# Altium PCB IMX385_EVB_revA.PcbDoc
Units mm, origin at the board's own origin, x right, y up, seen from the top; angles counter-clockwise.
Board outline 174 x 162.5 mm, 2 copper layers (Top Layer, Bottom Layer); 109 components, 47 nets, 384 pads, 0 vias.
Unrouted connection lines stored in the file: 311.
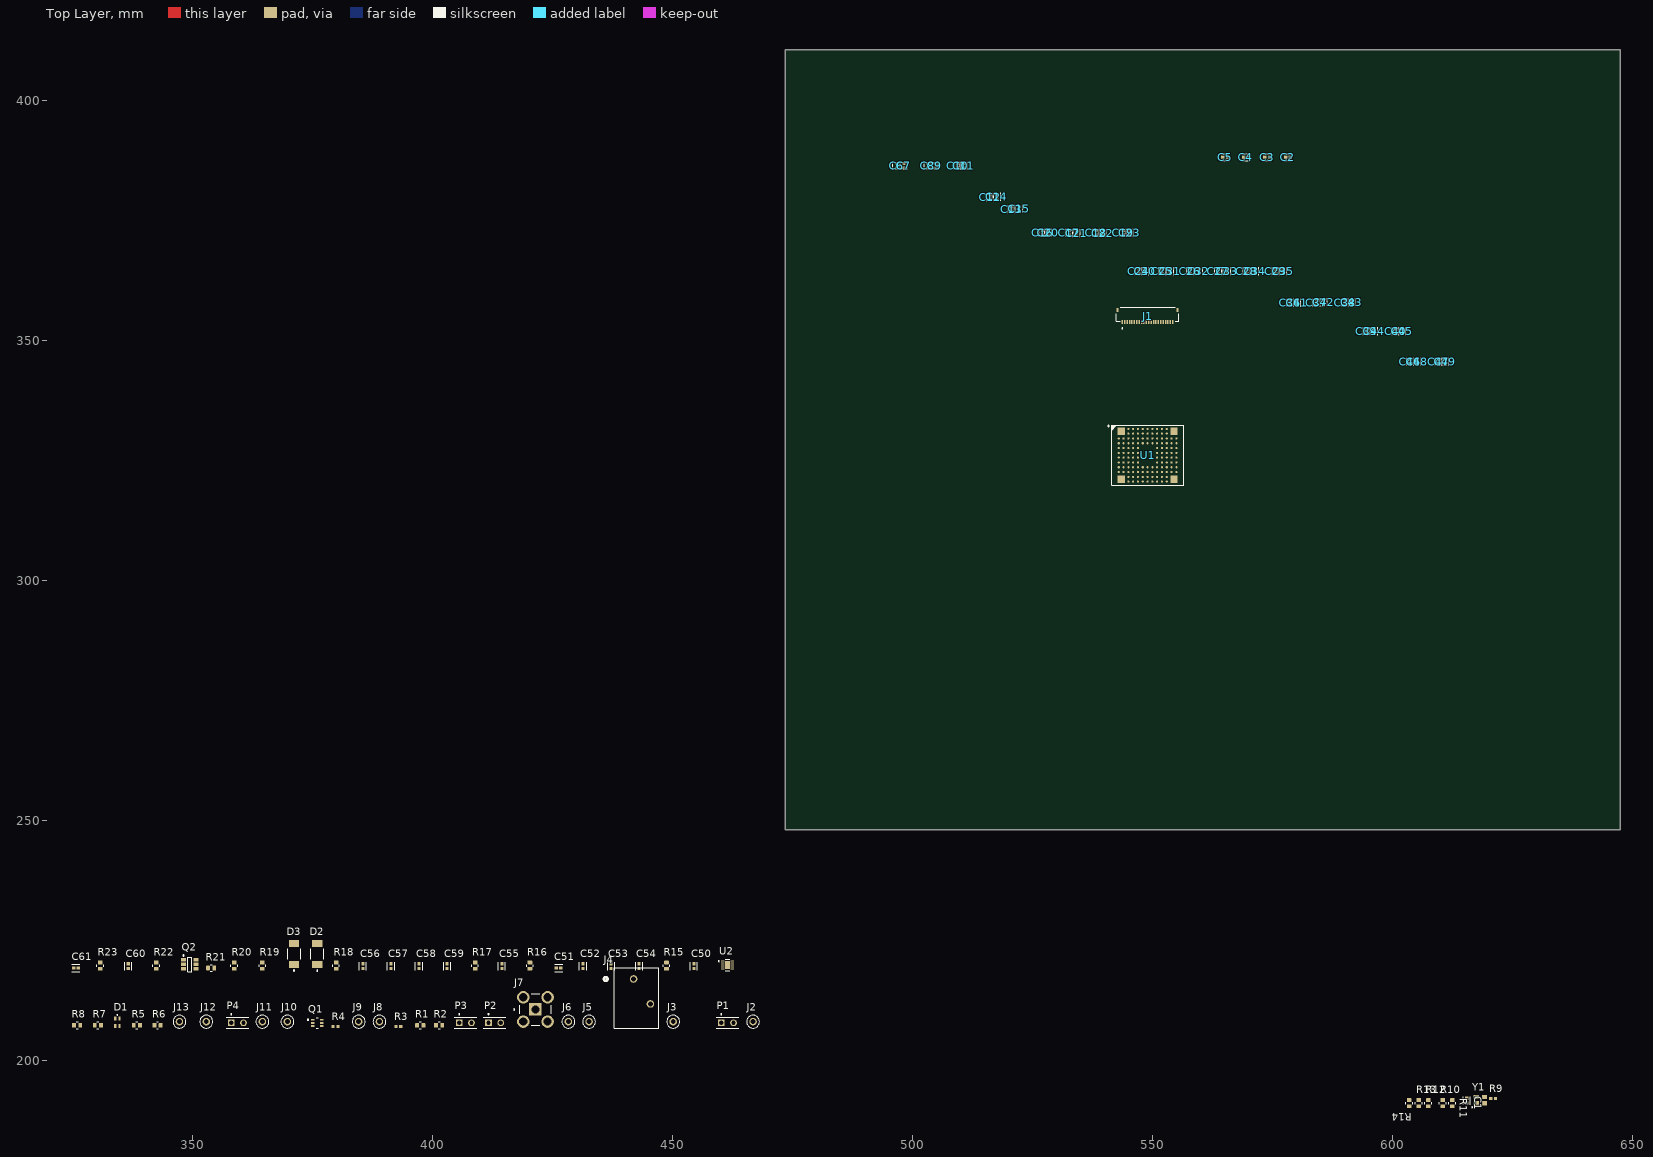
[diagram p0: Top Layer view]
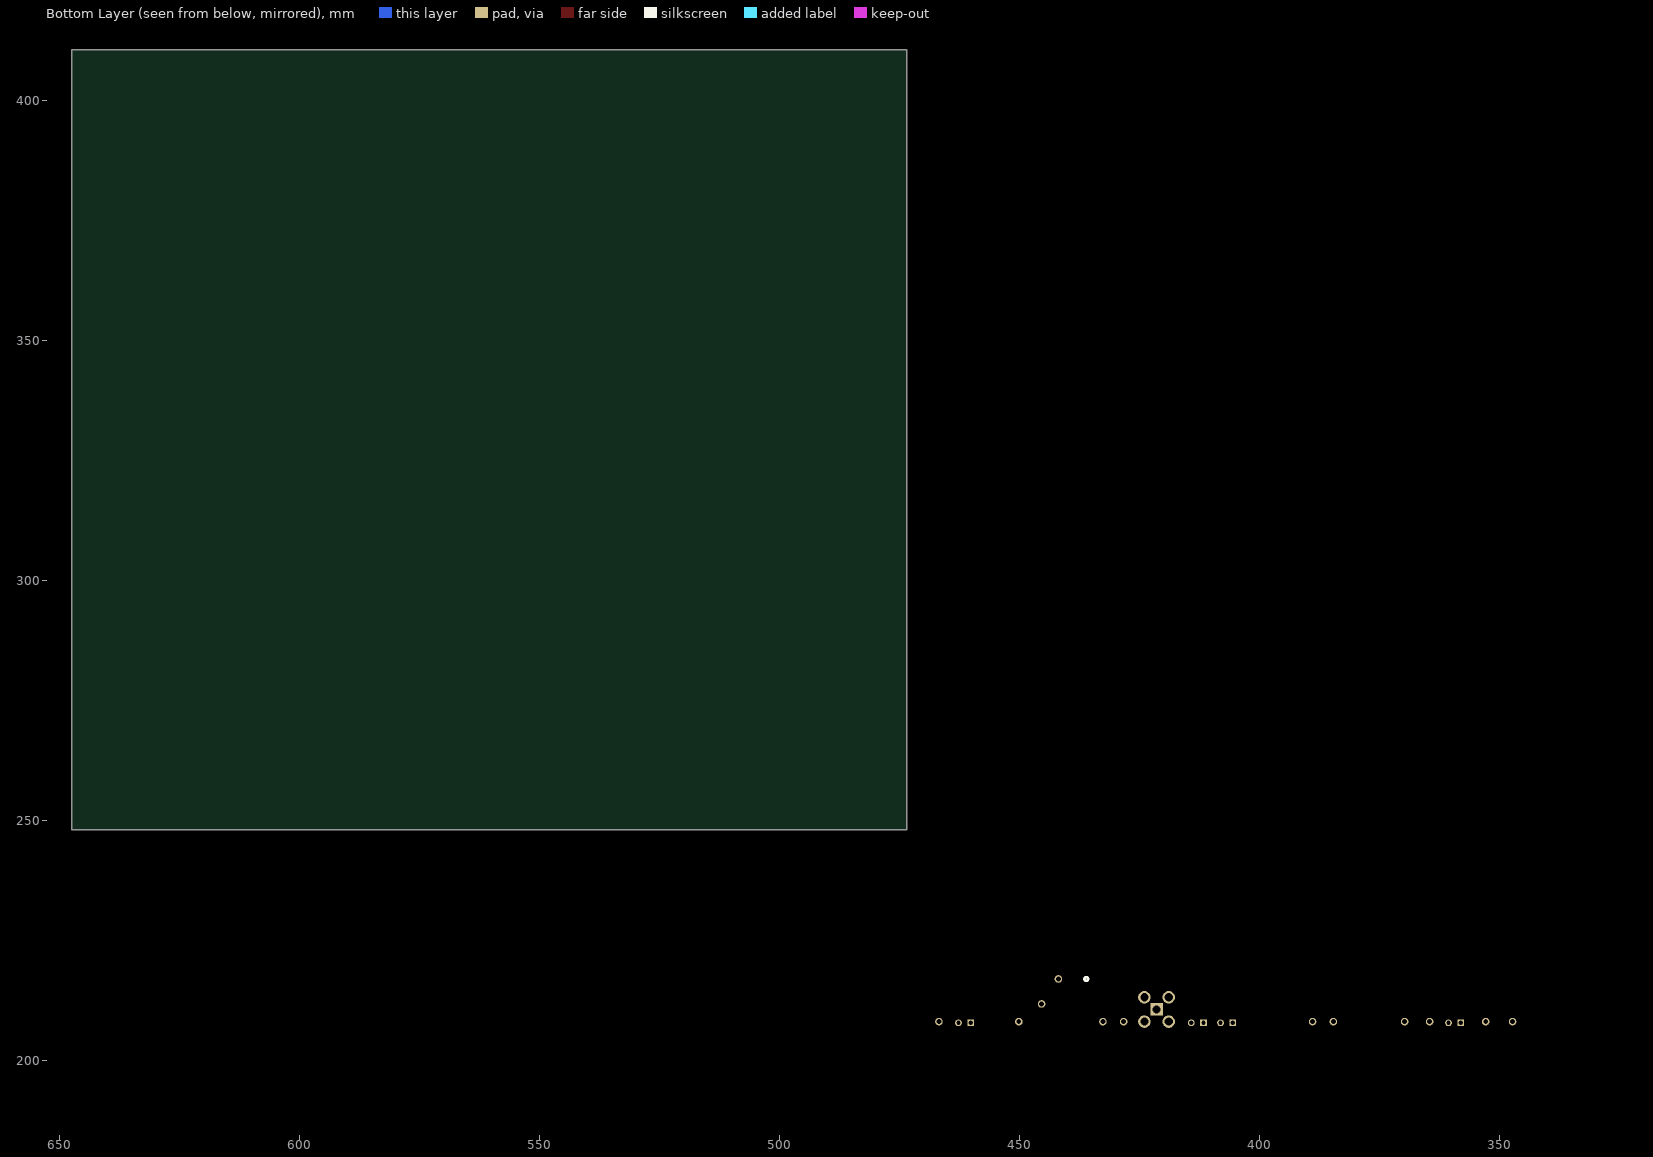
[diagram p1: Bottom Layer view, seen from below]

## Layer stack, top to bottom
Top Solder: solder mask 0.0102, Solder Resist, Dk 3.5
Top Layer: signal copper 0.0356
Dielectric 1: dielectric 0.32, FR-4, Dk 4.8
Bottom Layer: signal copper 0.0356
Bottom Solder: solder mask 0.0102, Solder Resist, Dk 3.5

## Board outline
473.5,248 473.5,410.5 647.5,410.5 647.5,248

## Design rules (kind name [scope] priority, off if disabled: settings)
BoardOutlineClearance [All] p1: gap=0.2 ignorepadtopadclearanceinfootprint=FALSE
Clearance "IMPEDANCE CLEARANCE" [InNetClass('50SINGLE') or InDifferentialPairClass('100DIFF') or InDifferentialPairClass('CSI') vs InNet('GND')] p1: gap=0.102 ignorepadtopadclearanceinfootprint=FALSE except(0.5: Arc-Poly Track-Poly THPad-Poly Via-Poly Fill-Poly Poly-Poly)
Clearance [All] p2: gap=0.102 ignorepadtopadclearanceinfootprint=FALSE except(0.127: Arc-Via Track-Via SMDPad-Via THPad-Via Via-Via Via-Fill Via-Poly Via-Region Via-Text; 0.25: Arc-Hole Track-Hole SMDPad-Hole THPad-Hole Via-Hole Fill-Hole Poly-Hole Region-Hole Text-Hole)
ComponentClearance [All] p1: gap=0.102 collisioncheckmode=3 verticalgap=0.102 showdistances=TRUE
DiffPairsRouting 100OHM [InDifferentialPairClass('100DIFF') or InDifferentialPairClass('CSI')] p1: maxlimit=0.2 minlimit=0.2 mostfreqgap=0.2 toplayer_minwidth=0.217 toplayer_maxwidth=0.217 toplayer_prefwidth=0.217 bottomlayer_minwidth=0.217 bottomlayer_maxwidth=0.217 bottomlayer_prefwidth=0.217 maxuncoupledlength=12.7
DiffPairsRouting [All] p2: maxlimit=0.102 minlimit=0.102 mostfreqgap=0.102 toplayer_minwidth=0.102 toplayer_maxwidth=1816.048 toplayer_prefwidth=0.2 bottomlayer_minwidth=0.102 bottomlayer_maxwidth=1816.048 bottomlayer_prefwidth=0.2 maxuncoupledlength=12.7
Height [All] p1: minheight=0 maxheight=1816.048 prefheight=12.7
HoleSize [All] p1: absolutevalues=TRUE maxlimit=6.3 minlimit=0.2 maxpercent=80.000 minpercent=20.000
HoleToHoleClearance [All] p1: gap=0.25 allowstackedmicrovias=FALSE
MatchedLengths CSI_INTRA_PAIR [InDifferentialPairClass('CSI')] p1: tolerance=25.4 checknetsindiffpair=TRUE checkdiffpairvsdiffpair=FALSE checkxsignals=FALSE checkothers=FALSE usedelayunits=TRUE delaytolerance=1.000000
MatchedLengths CSI_INTER_PAIR [InDifferentialPairClass('CSI')] p2: tolerance=25.4 checknetsindiffpair=FALSE checkdiffpairvsdiffpair=TRUE checkxsignals=TRUE checkothers=TRUE usedelayunits=TRUE delaytolerance=5.000000
MinimumAnnularRing [All] p1: minimumring=0.076
MinimumSolderMaskSliver [All] p1: minsoldermaskwidth=0
PlaneClearance [All] p1: clearance=0.102
PlaneConnect PlaneConnectPowerPads [InPadClass('PowerPads')] p1: planeconnectstyle=Direct reliefexpansion=0.508 reliefentries=4 reliefconductorwidth=0.254 reliefairgap=0.254
PlaneConnect [All] p2: pad.planeconnectstyle=Relief pad.reliefexpansion=0.3 pad.reliefentries=4 pad.reliefconductorwidth=0.102 pad.reliefairgap=0.102 via.planeconnectstyle=Direct via.reliefexpansion=0.3 via.reliefentries=4 via.reliefconductorwidth=0.127 via.reliefairgap=0.127
PolygonConnect PolygonConnectPowerPads [All vs InNetClass('PWR')] p1: connectstyle=Direct reliefconductorwidth=0.254 reliefentries=4 polygonreliefangle="90 Angle" airgapwidth=0.254
PolygonConnect [All] p2: thpad.connectstyle=Relief thpad.reliefconductorwidth=0.102 thpad.reliefentries=4 thpad.polygonreliefangle="90 Angle" thpad.airgapwidth=0.102 smdpad.connectstyle=Relief smdpad.reliefconductorwidth=0.102 smdpad.reliefentries=4 smdpad.polygonreliefangle="90 Angle" smdpad.airgapwidth=0.102 via.connectstyle=Direct via.reliefconductorwidth=0.127 via.reliefentries=4 via.polygonreliefangle="90 Angle" via.airgapwidth=0.127
RoutingVias [All] p1: holewidth=0.2 width=0.45 viastyle="Through Hole" minholewidth=0.2 minwidth=0.45 maxholewidth=6.3 maxwidth=6.55
SilkToSilkClearance [All] p1: silktosilkclearance=0
SilkToSolderMaskClearance [IsPad] p1: minsilkscreentomaskgap=0.102 clearancetoexposedcopper=TRUE
SolderMaskExpansion [All] p1: expansion=0.075 istentingtop=FALSE
SupplyNets "Schematic Supply Nets_8" [InNet('FAKRA_0_GND')] p1: voltage=0.000
SupplyNets "Schematic Supply Nets_7" [InNet('PoC_VCC')] p2: voltage=0.000
SupplyNets "Schematic Supply Nets_6" [InNet('1V8')] p3: voltage=0.000
SupplyNets "Schematic Supply Nets_5" [InNet('3V3')] p4: voltage=0.000
SupplyNets "Schematic Supply Nets_4" [InNet('LO_VCC')] p5: voltage=0.000
SupplyNets "Schematic Supply Nets_3" [InNet('FPC_3V3')] p6: voltage=0.000
SupplyNets "Schematic Supply Nets_2" [InNet('1V2')] p7: voltage=0.000
SupplyNets "Schematic Supply Nets_1" [InNet('GND')] p8: voltage=0.000
Width Width_50OHM [InNetClass('50SINGLE')] p1: maxlimit=0.342 minlimit=0.342 preferedwidth=0.342 minimp=50.000000 maximp=50.000000 favimp=50.000000
Width [All] p2: maxlimit=1816.048 minlimit=0.102 preferedwidth=0.2
20 further rules are at their usual default settings.

## Classes and differential pairs
differential pair class CSI: CSI_CK CSI_D0 CSI_D1 CSI_D2 CSI_D3
component class LDO_ARRAY_0: C50 C51 C52 C53 C54 C55 C56 C57 C58 C59 C60 C61 D2 D3 Q2 R15 R16 R17 R18 R19 R20 R21 R22 R23 U2
component class IMX385_EVB_revA: D1 J1 J2 J3 J4 J5 J6 J7 J8 J9 J10 J11 J12 J13 P1 P2 P3 P4 Q1 R1 R2 R3 R4 R5 R6 R7 R8
component class IMAGE_SENSOR_0: C1 C2 C3 C4 C5 C6 C7 C8 C9 C10 C11 C12 C13 C14 C15 C16 C17 C18 C19 C20 C21 C22 C23 C24 C25 C26 C27 C28 C29 C30 C31 C32 C33 C34 C35 C36 C37 C38 C39 C40 C41 C42 C43 C44 C45 C46 C47 C48 C49 R9 R10 R11 R12 R13 R14 U1 Y1
differential pair CSI_D3: +CSI_D3_P -CSI_D3_N
differential pair CSI_D2: +CSI_D2_P -CSI_D2_N
differential pair CSI_D1: +CSI_D1_P -CSI_D1_N
differential pair CSI_D0: +CSI_D0_P -CSI_D0_N
differential pair CSI_CK: +CSI_CK_P -CSI_CK_N

## Components (designator, comment, footprint, x,y, rotation, side; value= is the part's Value field where it differs from the comment)
C1 "100n" FP-0402-L_1_0_0_05-W_0_5-IPC_A 615.5,191.521 r270 top
C2 "1u" FP-0402-L_1_0_0_05-W_0_5-IPC_A 578.254,388.088 r0 top
C3 "1u" FP-0402-L_1_0_0_05-W_0_5-IPC_A 573.936,388.088 r0 top
C4 "220n" FP-0402-L_1_0_0_05-W_0_5-IPC_A 569.491,388.088 r0 top
C5 "1u" FP-0402-L_1_0_0_05-W_0_5-IPC_A 565.173,388.088 r0 top
C6 "10u" FP-0402-L_1_0_0_05-W_0_5-IPC_A 496.699,386.299 r270 top
C7 "100n" FP-0402-L_1_0_0_05-W_0_5-IPC_A 498.199,386.299 r270 top
C8 "10u" FP-0402-L_1_0_0_05-W_0_5-IPC_A 503.199,386.299 r90 top
C9 "100n" FP-0402-L_1_0_0_05-W_0_5-IPC_A 504.699,386.299 r90 top
C10 "10u" FP-0402-L_1_0_0_05-W_0_5-IPC_A 509.479,386.342 r90 top
C11 "100n" FP-0402-L_1_0_0_05-W_0_5-IPC_A 510.699,386.299 r90 top
C12 "1u" FP-0402-L_1_0_0_05-W_0_5-IPC_A 516.199,379.799 r90 top
C13 "10u" FP-0402-L_1_0_0_05-W_0_5-IPC_A 520.699,377.299 r90 top
C14 "100n" FP-0402-L_1_0_0_05-W_0_5-IPC_A 517.627,379.842 r90 top
C15 "100n" FP-0402-L_1_0_0_05-W_0_5-IPC_A 522.215,377.342 r90 top
C16 "4.7u" FP-0402-L_1_0_0_05-W_0_5-IPC_A 527.148,372.342 r90 top
C17 "4.7u" FP-0402-L_1_0_0_05-W_0_5-IPC_A 532.736,372.342 r90 top
C18 "4.7u" FP-0402-L_1_0_0_05-W_0_5-IPC_A 538.324,372.342 r90 top
C19 "4.7u" FP-0402-L_1_0_0_05-W_0_5-IPC_A 543.912,372.342 r90 top
C20 "10n" FP-0402-L_1_0_0_05-W_0_5-IPC_A 528.288,372.342 r90 top
C21 "10n" FP-0402-L_1_0_0_05-W_0_5-IPC_A 534.199,372.299 r90 top
C22 "10n" FP-0402-L_1_0_0_05-W_0_5-IPC_A 539.699,372.299 r90 top
C23 "10n" FP-0402-L_1_0_0_05-W_0_5-IPC_A 545.306,372.342 r90 top
C24 "4.7u" FP-0402-L_1_0_0_05-W_0_5-IPC_A 547.199,364.299 r90 top
C25 "4.7u" FP-0402-L_1_0_0_05-W_0_5-IPC_A 552.078,364.342 r90 top
C26 "4.7u" FP-0402-L_1_0_0_05-W_0_5-IPC_A 557.92,364.342 r90 top
C27 "4.7u" FP-0402-L_1_0_0_05-W_0_5-IPC_A 563.762,364.342 r90 top
C28 "4.7u" FP-0402-L_1_0_0_05-W_0_5-IPC_A 569.699,364.299 r90 top
C29 "4.7u" FP-0402-L_1_0_0_05-W_0_5-IPC_A 575.699,364.299 r90 top
C30 "100n" FP-0402-L_1_0_0_05-W_0_5-IPC_A 548.539,364.342 r90 top
C31 "100n" FP-0402-L_1_0_0_05-W_0_5-IPC_A 553.699,364.299 r90 top
C32 "100n" FP-0402-L_1_0_0_05-W_0_5-IPC_A 559.715,364.342 r90 top
C33 "100n" FP-0402-L_1_0_0_05-W_0_5-IPC_A 565.557,364.342 r90 top
C34 "100n" FP-0402-L_1_0_0_05-W_0_5-IPC_A 571.399,364.342 r90 top
C35 "100n" FP-0402-L_1_0_0_05-W_0_5-IPC_A 577.241,364.342 r90 top
C36 "4.7u" FP-0402-L_1_0_0_05-W_0_5-IPC_A 578.699,357.799 r90 top
C37 "4.7u" FP-0402-L_1_0_0_05-W_0_5-IPC_A 584.199,357.799 r90 top
C38 "4.7u" FP-0402-L_1_0_0_05-W_0_5-IPC_A 590.199,357.799 r90 top
C39 "1u" FP-0402-L_1_0_0_05-W_0_5-IPC_A 594.699,351.799 r90 top
C40 "1u" FP-0402-L_1_0_0_05-W_0_5-IPC_A 600.699,351.821 r90 top
C41 "100n" FP-0402-L_1_0_0_05-W_0_5-IPC_A 580.199,357.799 r90 top
C42 "100n" FP-0402-L_1_0_0_05-W_0_5-IPC_A 585.671,357.842 r90 top
C43 "100n" FP-0402-L_1_0_0_05-W_0_5-IPC_A 591.513,357.842 r90 top
C44 "10n" FP-0402-L_1_0_0_05-W_0_5-IPC_A 596.184,351.842 r90 top
C45 "10n" FP-0402-L_1_0_0_05-W_0_5-IPC_A 602.026,351.842 r90 top
C46 "1u" FP-0402-L_1_0_0_05-W_0_5-IPC_A 603.699,345.436 r90 top
C47 "1u" FP-0402-L_1_0_0_05-W_0_5-IPC_A 609.699,345.436 r90 top
C48 "100n" FP-0402-L_1_0_0_05-W_0_5-IPC_A 605.158,345.479 r90 top
C49 "100n" FP-0402-L_1_0_0_05-W_0_5-IPC_A 611,345.479 r90 top
C50 "10n" FP-0402-L_1_0_0_05-W_0_5-IPC_A 454.491,219.547 r90 top
C51 "100n" FP-0402-L_1_0_0_05-W_0_5-IPC_A 426.297,219.166 r0 top
C52 "100n" FP-0402-L_1_0_0_05-W_0_5-IPC_A 431.377,219.547 r90 top
C53 "100n" FP-0402-L_1_0_0_05-W_0_5-IPC_A 437.219,219.547 r90 top
C54 "100n" FP-0402-L_1_0_0_05-W_0_5-IPC_A 443.061,219.547 r90 top
C55 "10n" FP-0402-L_1_0_0_05-W_0_5-IPC_A 414.486,219.547 r90 top
C56 "100n" FP-0402-L_1_0_0_05-W_0_5-IPC_A 385.53,219.547 r90 top
C57 "100n" FP-0402-L_1_0_0_05-W_0_5-IPC_A 391.372,219.547 r90 top
C58 "100n" FP-0402-L_1_0_0_05-W_0_5-IPC_A 397.214,219.547 r90 top
C59 "100n" FP-0402-L_1_0_0_05-W_0_5-IPC_A 403.056,219.547 r90 top
C60 "100n" FP-0402-L_1_0_0_05-W_0_5-IPC_A 336.635,219.547 r90 top
C61 "100n" FP-0402-L_1_0_0_05-W_0_5-IPC_A 325.713,219.166 r0 top
D1 "150066RG54050" WL-SBCD_0606 334.349,207.863 r0 top
D2 "DNP/DNO/PMEG3050EP,115" FP-SOD128-MFG 376.005,222.087 r90 top
D3 "DNP/DNO/PMEG3050EP,115" FP-SOD128-MFG 371.179,222.087 r90 top
J1 "FH34SRJ-22S-0.5SH(50)" FH34SRJ-22S-0.5SH(50)-Footprint-1 549,355 r180 top
J2 "5001" FP-5001-MFG 466.81,207.99 r0 top
J3 "5001" FP-5001-MFG 450.173,207.99 r0 top
J4 "1-2834011-2" 1-2834011-2-Footprint-1 441.918,216.88 r0 top
J5 "5001" FP-5001-MFG 432.647,207.99 r0 top
J6 "5001" FP-5001-MFG 428.329,207.99 r0 top
J7 "DNP/1053354-1" FP-1053354-1-MFG 421.471,210.53 r0 top
J8 "5001" FP-5001-MFG 388.959,207.99 r0 top
J9 "5001" FP-5001-MFG 384.641,207.99 r0 top
J10 "5001" FP-5001-MFG 369.782,207.99 r0 top
J11 "5001" FP-5001-MFG 364.575,207.99 r0 top
J12 "5001" FP-5001-MFG 352.891,207.99 r0 top
J13 "5001" FP-5001-MFG 347.303,207.99 r0 top
P1 "5-146280-2" TECO-5-146280-2_V 461.476,207.736 r0 top
P2 "5-146280-2" TECO-5-146280-2_V 412.962,207.736 r0 top
P3 "5-146280-2" TECO-5-146280-2_V 406.866,207.736 r0 top
P4 "5-146280-2" TECO-5-146280-2_V 359.368,207.736 r0 top
Q1 "SSM6N7002KFU,LF" FP-SSOP6-P-0_65A-MFG 376.005,207.736 r0 top
Q2 "FDC6327C" FAIR-SOT23-6_V 349.462,219.928 r0 top
R1 "10k" R0603B 397.468,207.228 r0 top
R2 "10k" R0603B 401.405,207.228 r0 top
R3 "DNP" RESC1005X40X25ML05T05 392.896,206.974 r0 top
R4 "0402 JUMPER" RESC1005X40X25ML05T05 379.815,206.974 r0 top
R5 "10k" R0603B 338.413,207.228 r0 top
R6 "10k" R0603B 342.731,207.228 r0 top
R7 "1k" R0603B 330.285,207.228 r0 top
R8 "1k" R0603B 325.967,207.228 r0 top
R9 "0402 JUMPER" RESC1005X40X25ML05T05 621,192 r0 top
R10 "10k" R0603B 610.5,191 r90 top
R11 "DNP" R0603B 612.5,191 r270 top value=10k
R12 "1k" R0603B 607.5,191 r90 top
R13 "1k" R0603B 605.5,191 r90 top
R14 "10k" R0603B 603.5,191 r270 top
R15 "120k" R0603B 448.776,219.674 r90 top
R16 "100k" R0603B 420.328,219.674 r90 top
R17 "229k" R0603B 408.898,219.674 r90 top
R18 "100k" R0603B 379.942,219.674 r90 top
R19 "100k" R0603B 364.575,219.674 r90 top
R20 "1k" R0603B 358.733,219.674 r90 top
R21 "1k" R0603B 353.907,219.166 r0 top
R22 "100k" R0603B 342.477,219.674 r90 top
R23 "1k" R0603B 330.793,219.674 r90 top
U1 "IMX385LQR-C" BGA128C100P13X12_1500X1250X225 549,326 r0 top
U2 "TLV75101PDSQR" TLV75101PDSQR-Footprint-1 461.476,219.801 r0 top
Y1 "SG-8018CG 37.1250M-TJHSA3" "SG-8018CG 37.1250M-TJHSA3-Footprint-1" 618.35,191.65 r0 top

## Footprints (in the part's own frame and the unit in brackets; to place one, negate y for a bottom-side part, rotate by r counter-clockwise, add the part's x,y. Pads: shape width x height; smd on the part's side, far side on the other; paste and mask are expansions set on the pad)
1-2834011-2-Footprint-1 [mil]
  round 62 / inner round 60 / far side round 62 hole 42 paste-99999 mask+0: 1(0,0) 2(137.8,-204.72)
  silkscreen extent -243,-402 206,92, body extent -132,-386 202,86, height 499
BGA128C100P13X12_1500X1250X225 [mm] "BGA, 128-Leads, Body 15.00x12.50mmx2.25mm, Pitch 1.00mm"
  round 0.45 smd: A3(-4,5.5) A4(-3,5.5) A5(-2,5.5) A6(-1,5.5) A7(0,5.5) A8(1,5.5) A9(2,5.5) A10(3,5.5) A11(4,5.5) B3(-4,4.5) B4(-3,4.5) B5(-2,4.5) B6(-1,4.5) B7(0,4.5) B8(1,4.5) B9(2,4.5) B10(3,4.5) B11(4,4.5) C1(-6,3.5) C2(-5,3.5) C3(-4,3.5) C4(-3,3.5) C5(-2,3.5) C6(-1,3.5) C7(0,3.5) C8(1,3.5) C9(2,3.5) C10(3,3.5) C11(4,3.5) C12(5,3.5) C13(6,3.5) D1(-6,2.5) D2(-5,2.5) D3(-4,2.5) D4(-3,2.5) D5(-2,2.5) D6(-1,2.5) D7(0,2.5) D8(1,2.5) D9(2,2.5) D10(3,2.5) D11(4,2.5) D12(5,2.5) D13(6,2.5) E1(-6,1.5) E2(-5,1.5) E3(-4,1.5) E4(-3,1.5) E5(-2,1.5) E9(2,1.5) E10(3,1.5) E11(4,1.5) E12(5,1.5) E13(6,1.5) F1(-6,0.5) F2(-5,0.5) F3(-4,0.5) F4(-3,0.5) F5(-2,0.5) F9(2,0.5) F10(3,0.5) F11(4,0.5) F12(5,0.5) F13(6,0.5) G1(-6,-0.5) G2(-5,-0.5) G3(-4,-0.5) G4(-3,-0.5) G5(-2,-0.5) G9(2,-0.5) G10(3,-0.5) G11(4,-0.5) G12(5,-0.5) G13(6,-0.5) H1(-6,-1.5) H2(-5,-1.5) H3(-4,-1.5) H4(-3,-1.5) H5(-2,-1.5) H9(2,-1.5) H10(3,-1.5) H11(4,-1.5) H12(5,-1.5) H13(6,-1.5) J1(-6,-2.5) J2(-5,-2.5) J3(-4,-2.5) J4(-3,-2.5) J5(-2,-2.5) J6(-1,-2.5) J7(0,-2.5) J8(1,-2.5) J9(2,-2.5) J10(3,-2.5) J11(4,-2.5) J12(5,-2.5) J13(6,-2.5) K1(-6,-3.5) K2(-5,-3.5) K3(-4,-3.5) K4(-3,-3.5) K5(-2,-3.5) K6(-1,-3.5) K7(0,-3.5) K8(1,-3.5) K9(2,-3.5) K10(3,-3.5) K11(4,-3.5) K12(5,-3.5) K13(6,-3.5) L3(-4,-4.5) L4(-3,-4.5) L5(-2,-4.5) L6(-1,-4.5) L7(0,-4.5) L8(1,-4.5) L9(2,-4.5) L10(3,-4.5) L11(4,-4.5) M3(-4,-5.5) M4(-3,-5.5) M5(-2,-5.5) M6(-1,-5.5) M7(0,-5.5) M8(1,-5.5) M9(2,-5.5) M10(3,-5.5) M11(4,-5.5)
  rect 1.5x1.5 smd: EP1(-5.5,5) EP2(5.5,5) EP3(-5.5,-5) EP4(5.5,-5)
  silkscreen extent -8.27,-6.25 7.5,6.25, body extent -7.5,-6.25 7.5,6.25, height 2.25
FAIR-SOT23-6_V [mm] "SOT23, 6-Leads, Body 2.9x1.6mm, Pitch 0.95mm"
  rect 1x0.7 smd: 1(-1.3,0.95) 2(-1.3,0) 3(-1.3,-0.95) 4(1.3,-0.95) 5(1.3,0) 6(1.3,0.95)
  silkscreen extent -1.42,-1.5 0.4,1.97, body extent -1.4,-1.45 1.4,1.45, height 1.45
FH34SRJ-22S-0.5SH(50)-Footprint-1 [mm]
  rect 0.3x0.8 smd paste-1: 1(5.25,1.25) 2(4.75,1.25) 3(4.25,1.25) 4(3.75,1.25) 5(3.25,1.25) 6(2.75,1.25) 7(2.25,1.25) 8(1.75,1.25) 9(1.25,1.25) 10(0.75,1.25) 11(0.25,1.25) 12(-0.25,1.25) 13(-0.75,1.25) 14(-1.25,1.25) 15(-1.75,1.25) 16(-2.25,1.25) 17(-2.75,1.25) 18(-3.25,1.25) 19(-3.75,1.25) 20(-4.25,1.25) 21(-4.75,1.25) 22(-5.25,1.25)
  rect 0.4x0.8 smd: S1(6.25,-1.25) S2(-6.25,-1.25)
  silkscreen extent -6.5,-1.8 6.5,2.65, body extent -6.5,-1.9 6.5,1.9, height 1
FP-0402-L_1_0_0_05-W_0_5-IPC_A [mm]
  rect 0.715x0.672 smd paste+0 mask+0: 1(-0.479,0) 2(0.479,0)
  silkscreen extent -0.84,-0.74 0.84,0.74, body extent -1.04,-0.54 1.04,0.54, height 0.25
FP-5001-MFG [mm]
  round 1.57 hole 1.016 paste-2539.97 mask+0: 1(0,0)
  silkscreen extent -1.35,-1.34 1.35,1.34, body extent -1.45,-1.45 1.45,1.45, height 0.25
FP-1053354-1-MFG [mm]
  rect 2.6x2.6 hole 1.7 paste-2539.97 mask+0: 1(0,0)
  round 2.6 hole 1.7 paste-2539.97 mask+0: 2(-2.54,2.54) 3(2.54,2.54) 4(-2.54,-2.54) 5(2.54,-2.54)
  silkscreen extent -4.56,-3.24 3.24,3.24, body extent -3.94,-3.94 3.94,3.94, height 0.25
FP-SOD128-MFG [mm]
  rect 1.4x2.1 smd paste-1000 mask+0: 1(-2.2,0) 2(2.2,0)
  silkscreen extent -3.57,-1.35 1.12,1.35, body extent -3.1,-1.7 3.1,1.7, height 0.25
FP-SSOP6-P-0_65A-MFG [mm]
  rect 0.8x0.4 smd paste+0 mask+0: 1(-0.95,0.65) 2(-0.95,0) 3(-0.95,-0.65) 4(0.95,-0.65) 5(0.95,0) 6(0.95,0.65)
  silkscreen extent -2.05,-1.1 0.18,1.1, body extent -1.45,-1.2 1.45,1.2, height 0.25
R0603B [mm] "Chip Resistor, 0603, 2-Leads, Body 1.58x0.85mm, IPC Medium Density"
  rrect25% 0.8x0.95 smd: 1(-0.65,0) 2(0.65,0)
  silkscreen extent -0.2,-0.7 0.2,0.7, body extent -0.82,-0.48 0.82,0.48, height 0.5
RESC1005X40X25ML05T05 [mm] "Chip Resistor, 2-Leads, Body 1.00x0.50mm, IPC Low Density"
  rect 0.65x0.65 smd: 1(-0.5,0) 2(0.5,0)
  body extent -0.53,-0.27 0.53,0.28, height 0.4
"SG-8018CG 37.1250M-TJHSA3-Footprint-1" [mm]
  rrect22% 1.1x0.9 smd: 1(-0.85,-0.65) 2(0.85,-0.65) 3(0.85,0.65) 4(-0.85,0.65)
  silkscreen extent -1.85,-1.6 -1.65,-1.4
TECO-5-146280-2_V [mm] "Connector, 2-Leads, Body 4.67x2.34mm, Pitch 2.54mm"
  rect 1.4x1.4 hole 0.89: 1(-1.27,0)
  round 1.4 hole 0.89: 2(1.27,0)
  silkscreen extent -2.33,-1.17 2.33,1.94, body extent -2.34,-1.17 2.34,1.17, height 5.33
TLV75101PDSQR-Footprint-1 [mil]
  rect 27.81x8.03 smd paste+0 mask+0: 1(-39.41,31.5) 2(-39.41,15.75) 3(-39.41,0) 4(-39.41,-15.75) 5(-39.41,-31.5) 6(39.41,-31.5) 7(39.41,-15.75) 8(39.41,0) 9(39.41,15.75) 10(39.41,31.5)
  rect 39x63 smd paste+0 mask+0: 11(0,0)
  silkscreen extent -75,-46 18,46, body extent -41,-41 41,41, height 32
WL-SBCD_0606 [mm] "SMT Bi-color Chip LED Diffuesed, body 1.5x1.6mm"
  rect 0.5x0.8 smd: 1(-0.45,0.8) 2(-0.45,-0.8) 3(0.45,-0.8) 4(0.45,0.8)
  silkscreen extent -0.07,1.48 0.08,1.62, body extent -0.75,-0.8 0.75,0.8, height 0.55

## Part data
C1 C2 C3 C4 C5 C6 C7 C8 C9 C10 C11 C12 C13 C14 C15 C16 C17 C18 C19 C20 C21 C22 C23 C24 C25 C26 C27 C28 C29 C30 C31 C32 C33 C34 C35 C36 C37 C38 C39 C40 C41 C42 C43 C44 C45 C46 C47 C48 C49 C50 C51 C52 C53 C54 C55 C56 C57 C58 C59 C60 C61: library part CMP-001-00058-1, "LARGE PADS, 0402 CAP, CHANGE COMMENT TO MATCH REAL P/N", Capacitor Type=Ceramic, Case/Package=0402, Max Operating Temperature=85°C, Min Operating Temperature=-55°C, Mounting Technology="Surface Mount", Pins=2, RoHS Compliant=Yes
D1: library part CMP-004-00040-2, "Led, Red/Grn, 180Mcd/230Mcd, 624Nm/525Nm Rohs Compliant: Yes", Component Type=Standard, Design Item ID=CMP-004-00034-2, Pins=4, Source=rgled.SchLib
D2 D3: library part CMP-14398-000051-1, "DIODE SCHOTTKY 30V 5A SOD128", RoHS Compliant=Yes
J1: library part CMP-002-00104-1, "0.5Mm Pitch, 1.0Mm Height, Top And Bottom Contact, Back-Flip", Max Operating Temperature=105°C, Min Operating Temperature=-55°C, Connector Type=Receptacle, Mounting Technology="Surface Mount", Pins=22
J2 J3 J5 J6 J8 J9 J10 J11 J12 J13: library part CMP-2000-05181-2, "PC TEST POINT MINIATURE BLACK", Color=Black, Flammability Rating="UL94 V-0", Package Quantity=100, Body Material=Bronze, Contact Material=Bronze, Contact Plating=Silver, Diameter=2.54mm, Height=0.3inch, Hole Diameter=1.6mm, Housing Color=Black, Inside Diameter=1.27mm, Insulation=Insulated, Insulation Material=Nylon, Lead Free="Lead Free", Length=7.62mm, Material=Nylon, Mount="Through Hole", Number of Contacts=1, Number of Ports=1, Orientation=Straight, Outside Diameter=2.54mm, Packaging=Bulk, Plating=Silver, REACH SVHC="No SVHC", RoHS Compliant=Yes, Series=THM, Termination="Through Hole"
J4: library part CMP-002-00067-1, "Barrier Strip Terminal Block", RoHS Compliant=Yes
J7: library part CMP-2000-05830-2, "CONN SMA JACK STR 50 OHM PCB", Case/Package=SMA, Dielectric Material=PTFE, Frequency=18GHz, Housing Color=Gold, Max Frequency=12.4GHz, Operating Frequency=N/A, Package Quantity=125, Body Material="Stainless Steel", Body Plating=Gold, Center Contact Plating=Gold, Connector Type=SMA, Contact Material=Copper, Contact Plating=Gold, Depth=6.3mm, Fastening Type=Threaded, Gender=Female, Height=9.5mm, Impedance=50R, Insulation Material=Polytetrafluoroethylene, Length=9.53mm, Mating Cycles=500, Mount="Through Hole", Number of Ports=1, Orientation=Straight, Packaging=Bag, PCB Mounting Orientation=Vertical, Plating=Gold, Polarity=Normal, Radiation Hardening=No, REACH SVHC="No SVHC", RoHS Compliant=Yes, Series=SMA, Termination=Solder
P1 P2 P3 P4: library part CMP-2000-07492-1, "Male Header, Pitch 2.54 mm, 1 x 2 Position, Height 8.21 mm, Tail Length 3.05 mm, -65 to 105 degC, RoHS, Bulk", Case\/Package=100, Colour=Black, Current Rating=3A, Flammability Rating=UL94V-0, High Temperature Housing=Yes, Manufacturer="TE Connectivity", Max Current Rating=5A, Max Operating Temperature=105degC, Min Operating Temperature=-65degC, Package Description="Male Header, Pitch 2.54 mm, 1 x 2 Position, Height 8.21 mm, Tail Length 3.05 mm", Package Quantity=500, Approvals=CSA, Board Standoff=No(Without), Connector Type=Header, Contact Gender=Male, Contact Material=CopperAlloy, Contact Mating Length=0.23inch, Contact Plating=Matte, Contact Protection=No(Without), Contact Shape=Square, Datasheet URL=http://www.te.com/commerce/DocumentDelivery/DDEController?Action=showdoc&DocId=Customer+Drawing%7F146280%7FH1%7Fpdf%7FEnglish%7FENG_CD_146280_H1.pdf%7F5-146280-2, Datasheet Version="Rev. H1, 08/2016", Depth=2.34mm, Gasket=No(Without), High Speed Serial Data Connector=No, Housing Colour=Black, Housing Material=Polymer, Keyed=No, Length=4.67mm, Manufacturer URL=http://www.te.com/, Mating Alignment=No(Without), Mating Connector Lock=No(Without), Mating Post Length=0.23inch, Mount=ThroughHole, Mounting Technology=ThroughHole, Number of Contacts=2, Number of Positions=2, Number of Rows=1, Orientation=Straight, Package Reference=5-146280-2, Packaging=Carton, Panel Mount Retention=No(Without), PCB Mount Retention=Without, PCB Mounting Orientation=Vertical, PCB Thickness=0.063inch, Pitch=2.54mm, Radiation Hardening=No, RoHSCompliant=true, Row Spacing=2.54mm, Selectively Loaded=No(Without), Stabilizers=No(Without), Termination=ThroughHole, Termination Post Length=0.12inch
Q1: library part CMP-35916-000009-1, "MOSFET 2N-CH 60V 0.3A", Continuous Drain Current (ID)=300mA, Drain to Source Voltage (Vdss)=60V, Input Capacitance=40pF, Max Power Dissipation=285mW, FET Type="2 N-Channel", Mount="Surface Mount", Packaging="Tape and Reel", Rds On Max=1.5R
Q2: library part CMP-2000-04939-1, "Dual N & P-Channel 2.5 V Specified PowerTrench(TM) MOSFET, -55 to 150 degC, 6-Pin SOT-23, RoHS, Tape and Reel", Manufacturer=Fairchild, Maximum Continuous Drain Current=2.7@NChannel, Maximum Drain Source Voltage=20V, Maximum Gate Source Voltage=±8V, Operating Temperature=-55to150degC, Package=6SuperSOT, Package Description="6-Pin Small Outline Transistor, Body 2.9 x 1.6 mm, Pitch 0.95 mm", Package Reference=SOT23-6, Package Version="Rev. 5, 05/2015", Category=MOSFET, Channel Mode=Enhancement, Channel Type=N, Datasheet URL=https://www.fairchildsemi.com/datasheets/FD/FDC6327C.pdf, Datasheet Version="Rev. E, 07/2000", Manufacturer URL=https://www.fairchildsemi.com/, Mounting=SurfaceMount, Package URL=https://www.fairchildsemi.com/package-drawings/MA/MA06A.pdf, Packaging=Tape&Reel, Rad Hard=No, RDS-on=80@4.5V@NChannel, Typical Fall Time=3@NChannel, Typical Rise Time=9@NChannel, Typical Turn-Off Delay Time=12@NChannel, Typical Turn-On Delay Time=5@NChannel
R1 R2 R5 R6 R7 R8 R10 R11 R12 R13 R14 R15 R16 R17 R18 R19 R20 R21 R22 R23: library part CMP-009-00002-14, "Resistor"
R3 R4 R9: library part CMP-009-00118-2, "READ THE NAME", Component Type=Standard, Design Item ID=CMP-009-00206-2, Pins=2, Source=0402jump.SchLib
U1: library part CMP-010-00040-3, "Sony Starvis 2.13MP MIPI 1/2\" Image Sensor"
U2: library part CMP-019-00062-2, "500-mA, low-IQ, high-PSRR, dual-channel low-dropout (LDO) voltage regulator 10-WSON -40 to 125", Pins=10
Y1: library part CMP-003-00017-1, "SG-8018CG 37.1250M-TJHSA3: Mhz Osc 1.8V~3.3V +/-50PPM -40~105C St 250TR", Frequency=37.125MHz, Load Capacitance=15pF, Max Operating Temperature=105°C, Min Operating Temperature=-40°C, Mounting Technology="Surface Mount"

## Nets (pads, with @x,y where several pads share a name; then routed paths per layer and width w, separated by ;. In a path a pad name is that pad's centre, name@x,y a point inside that pad or via, vN(x,y) a via of type N, cw(c..) or ccw(c..) an arc to the next point about the centre after c; other vN are vias at no path point)
1V2_PWR_OUT: C24.1 C25.1 C26.1 C27.1 C28.1 C29.1 C30.1 C31.1 C32.1 C33.1 C34.1 C35.1 C36.1 C37.1 C38.1 C39.1 C40.1 C41.1 C42.1 C43.1 C44.1 C45.1 C46.1 C47.1 C48.1 C49.1 C50.2 C53.1 C54.1 D2.2 J6.1 R21.1 U1.C13 U1.D4 U1.D5 U1.D6 U1.D9 U1.D10 U1.J5 U1.J6 U1.J7 U1.M6 U1.M8 U1.M10 U1.M11 U2.10
1V8_IMX385_INCK: R3.1 R4.1 R9.2 U1.D7
1V8_IMX385_nRST: D1.4 P4.2 R11.2 U1.C6
1V8_IMX385_SCK: J10.1 Q1.4 R6.1 R13.1 U1.E5
1V8_IMX385_SDA: J8.1 Q1.1 R2.1 R12.1 U1.F5
1V8_IMX385_XHS: J13.1 U1.B6
1V8_IMX385_XTRIG: J11.1 U1.G5
1V8_IMX385_XVS: J12.1 U1.A6
1V8_PWR_OUT: C1.1 C16.1 C17.1 C18.1 C19.1 C20.1 C21.1 C22.1 C23.1 C55.2 C58.1 C59.1 D3.2 J5.1 Q1.2 Q1.5 R2.2 R6.2 R8.2 R10.2 R11.1 R12.2 R13.2 R23.1 U1.F9 U1.F10 U1.G9 U1.G10 U2.8 Y1.4
3V3: C6.1 C7.1 C8.1 C9.1 C10.1 C11.1 C12.1 C13.1 C14.1 C15.1 D1.2 J3.1 Q2.5 R1.2 R5.2 U1.D1 U1.G1 U1.H1 U1.J1 U1.K1
3V3_EN_1V8: C60.1 R21.2 U2.5
3V3_EN_3V3: C61.1 Q2.3 R22.1 R23.2
3V3_FPC_IO0: J1.6 P4.1
3V3_FPC_SCL: J1.3 P3.1
3V3_FPC_SDA: J1.2 P2.1
3V3_IMX385_SCK: P3.2 Q1.3 R5.1
3V3_IMX385_SDA: P2.2 Q1.6 R1.1
3V3_PWR_IN: C51.1 C52.1 C56.1 C57.1 D2.1 D3.1 J4.1 P1.2 Q2.6 R19.1 U2.3 U2.6 U2.9
CSI_CK_N: J1.15 U1.B9
CSI_CK_P: J1.14 U1.A9
CSI_D0_N: J1.21 U1.B8
CSI_D0_P: J1.20 U1.A8
CSI_D1_N: J1.18 U1.B10
CSI_D1_P: J1.17 U1.A10
CSI_D2_N: J1.12 U1.B7
CSI_D2_P: J1.11 U1.A7
CSI_D3_N: J1.9 U1.B11
CSI_D3_P: J1.8 U1.A11
FPC_3V3: J1.1 J2.1 P1.1
GND: C1.2 C2.2 C3.2 C4.2 C5.2 C6.2 C7.2 C8.2 C9.2 C10.2 C11.2 C12.2 C13.2 C14.2 C15.2 C16.2 C17.2 C18.2 C19.2 C20.2 C21.2 C22.2 C23.2 C24.2 C25.2 C26.2 C27.2 C28.2 C29.2 C30.2 C31.2 C32.2 C33.2 C34.2 C35.2 C36.2 C37.2 C38.2 C39.2 C40.2 C41.2 C42.2 C43.2 C44.2 C45.2 C46.2 C47.2 C48.2 C49.2 C51.2 C52.2 C53.2 C54.2 C56.2 C57.2 C58.2 C59.2 C60.2 C61.2 J1.4 J1.7 J1.10 J1.13 J1.16 J1.19 J1.22 J1.S1 J1.S2 J4.2 J7.2 J7.3 J7.4 J7.5 Q2.2 R7.1 R14.2 R16.1 R18.1 R22.2 U1.A3 U1.B3 U1.C3 U1.C4 U1.C5 U1.C7 U1.C8 U1.C9 U1.C10 U1.C11 U1.C12 U1.D2 U1.D3 U1.D8 U1.E9 U1.E10 U1.EP1 U1.EP2 U1.EP3 U1.EP4 U1.F2 U1.F3 U1.G2 U1.G4 U1.H2 U1.H4 U1.H5 U1.H9 U1.H10 U1.H13 U1.J2 U1.J4 U1.J8 U1.J9 U1.J10 U1.J11 U1.K2 U1.K3 U1.K4 U1.K5 U1.K6 U1.K7 U1.K8 U1.K9 U1.K10 U1.K11 U1.L3 U1.L4 U1.L5 U1.L6 U1.L7 U1.L8 U1.L9 U1.L10 U1.L11 U1.M3 U1.M4 U1.M5 U1.M7 U1.M9 U2.2 U2.4 U2.11 Y1.1 Y1.2
NetC2_1: C2.1 U1.F1 U1.G3
NetC3_1: C3.1 U1.C1 U1.C2
NetC4_1: C4.1 U1.J3
NetC5_1: C5.1 U1.E3
NetC50_1: C50.1 R15.1
NetC55_1: C55.1 R17.1
NetD1_1: D1.1 R7.2
NetD1_3: D1.3 R8.1
NetJ7_1: J7.1 R3.2
NetJ9_1: J9.1 R4.2
NetQ2_1: Q2.1 R19.2 R20.1
NetQ2_4: Q2.4 R20.2
NetR9_1: R9.1 Y1.3
NetR10_1: R10.1 U1.A5
NetR14_1: R14.1 U1.B5
NetR15_2: R15.2 R16.2 U2.1
NetR17_2: R17.2 R18.2 U2.7
pads on no net: J1.5 U1.A4 U1.B4 U1.D11 U1.D12 U1.D13 U1.E1 U1.E2 U1.E4 U1.E11 U1.E12 U1.E13 U1.F4 U1.F11 U1.F12 U1.F13 U1.G11 U1.G12 U1.G13 U1.H3 U1.H11 U1.H12 U1.J12 U1.J13 U1.K12 U1.K13